# Altium PCB LKS_EVB_MVPOW_V4.0.PcbDoc (part 1 of 2)
Units mil, origin at the board's own origin, x right, y up, seen from the top; angles counter-clockwise.
Board outline 11300 x 7874.02 mil, 2 copper layers (Top Layer, Bottom Layer); 132 components, 86 nets, 363 pads, 334 vias.
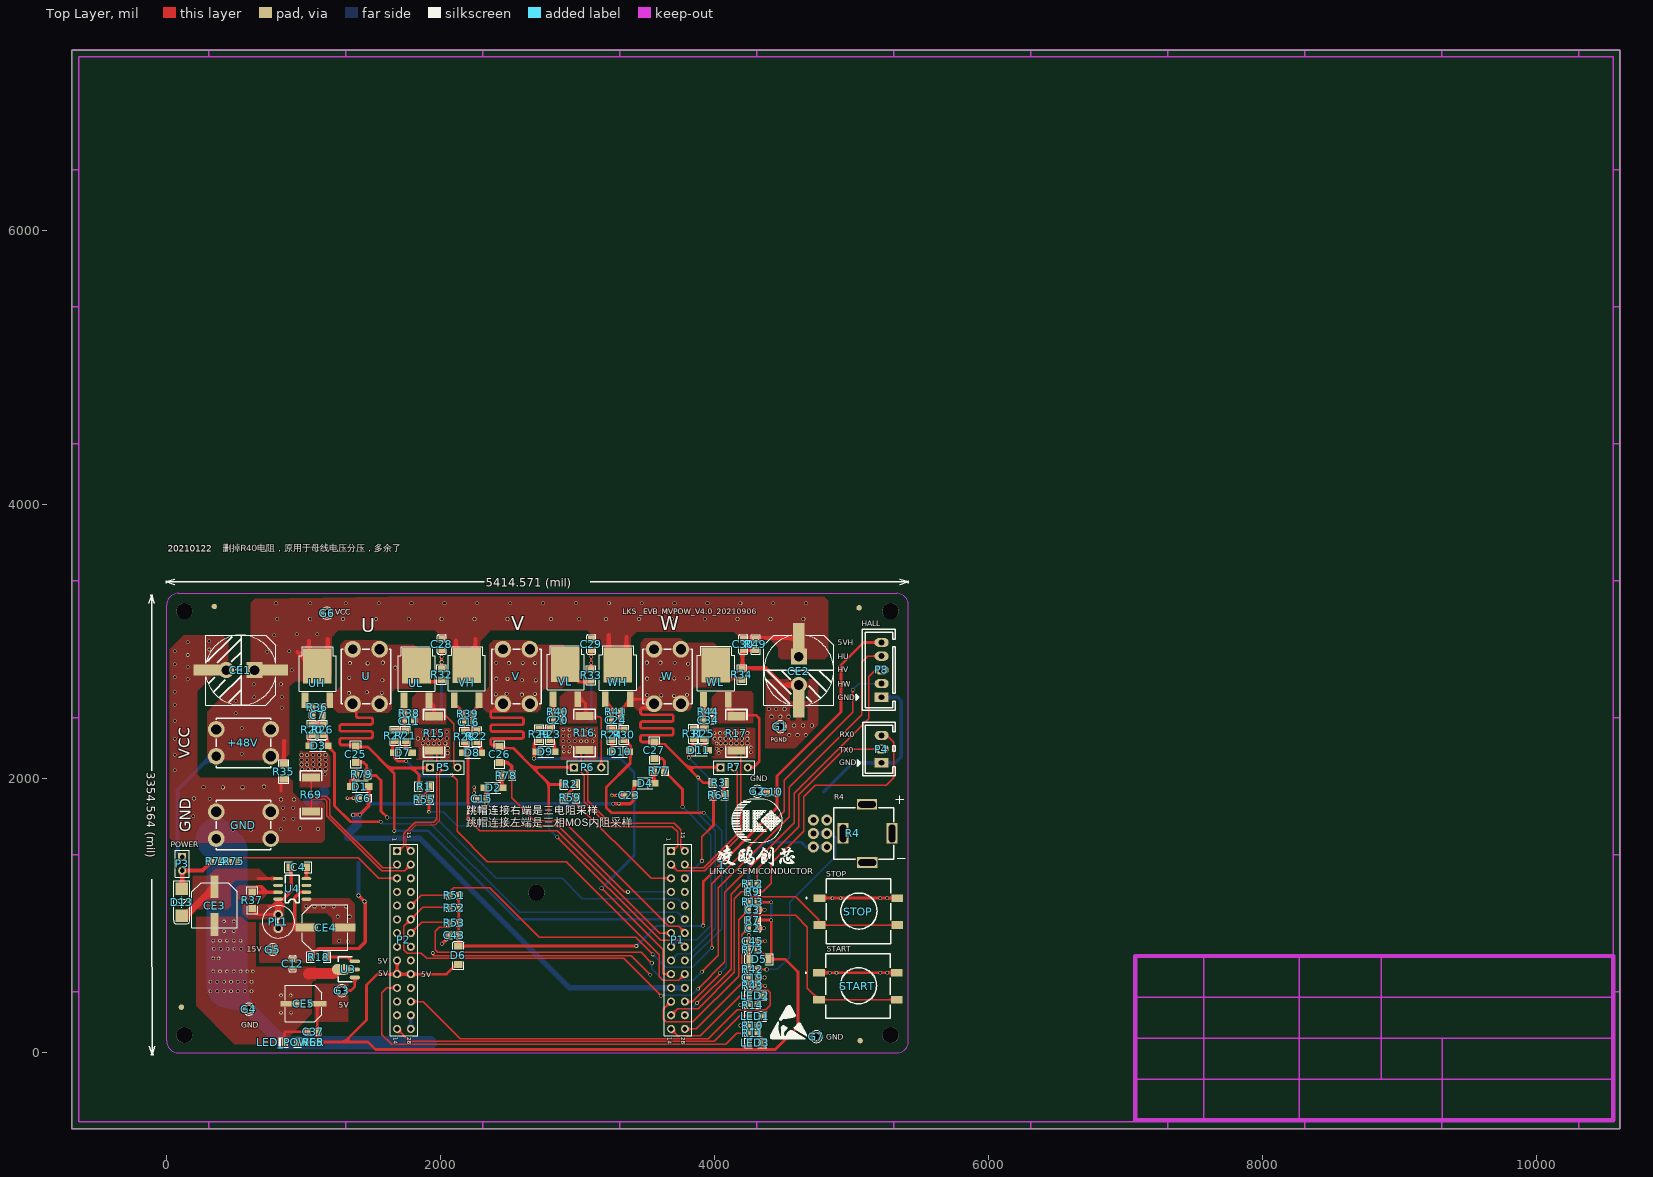
[diagram p0: Top Layer view]
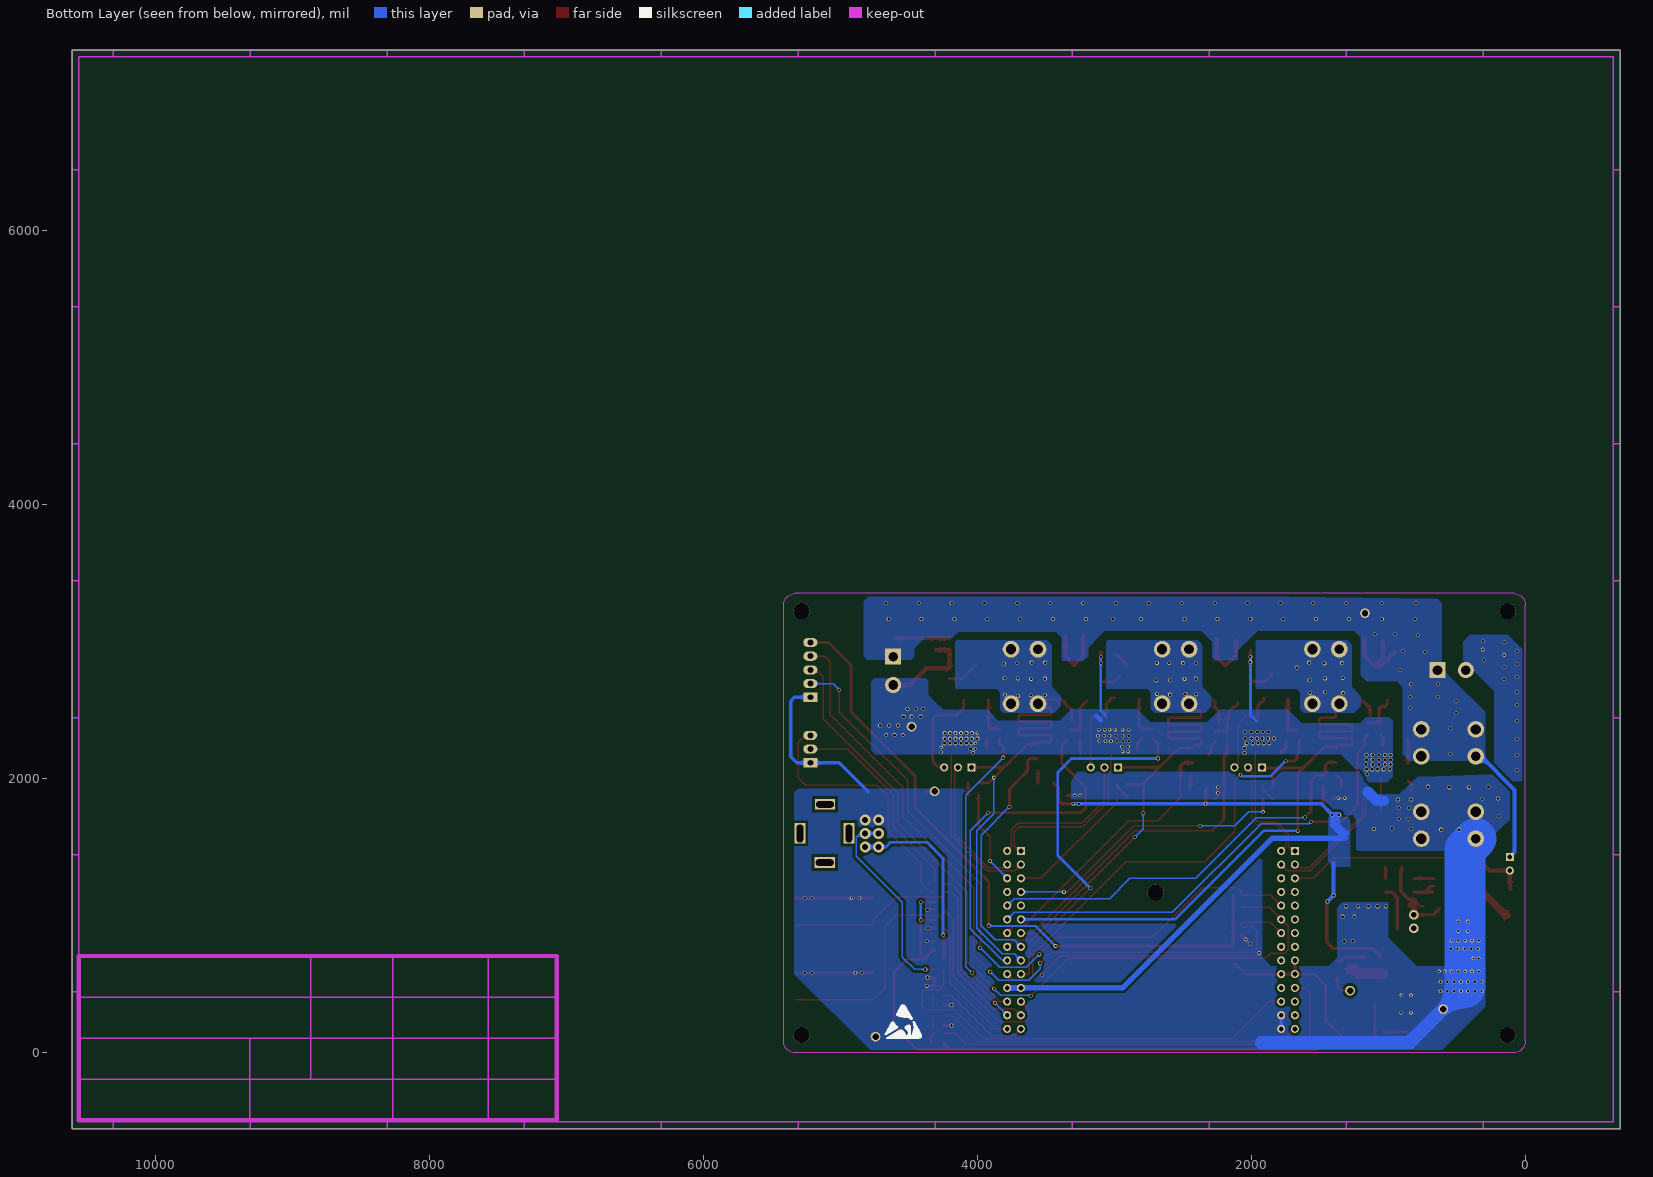
[diagram p1: Bottom Layer view, seen from below]
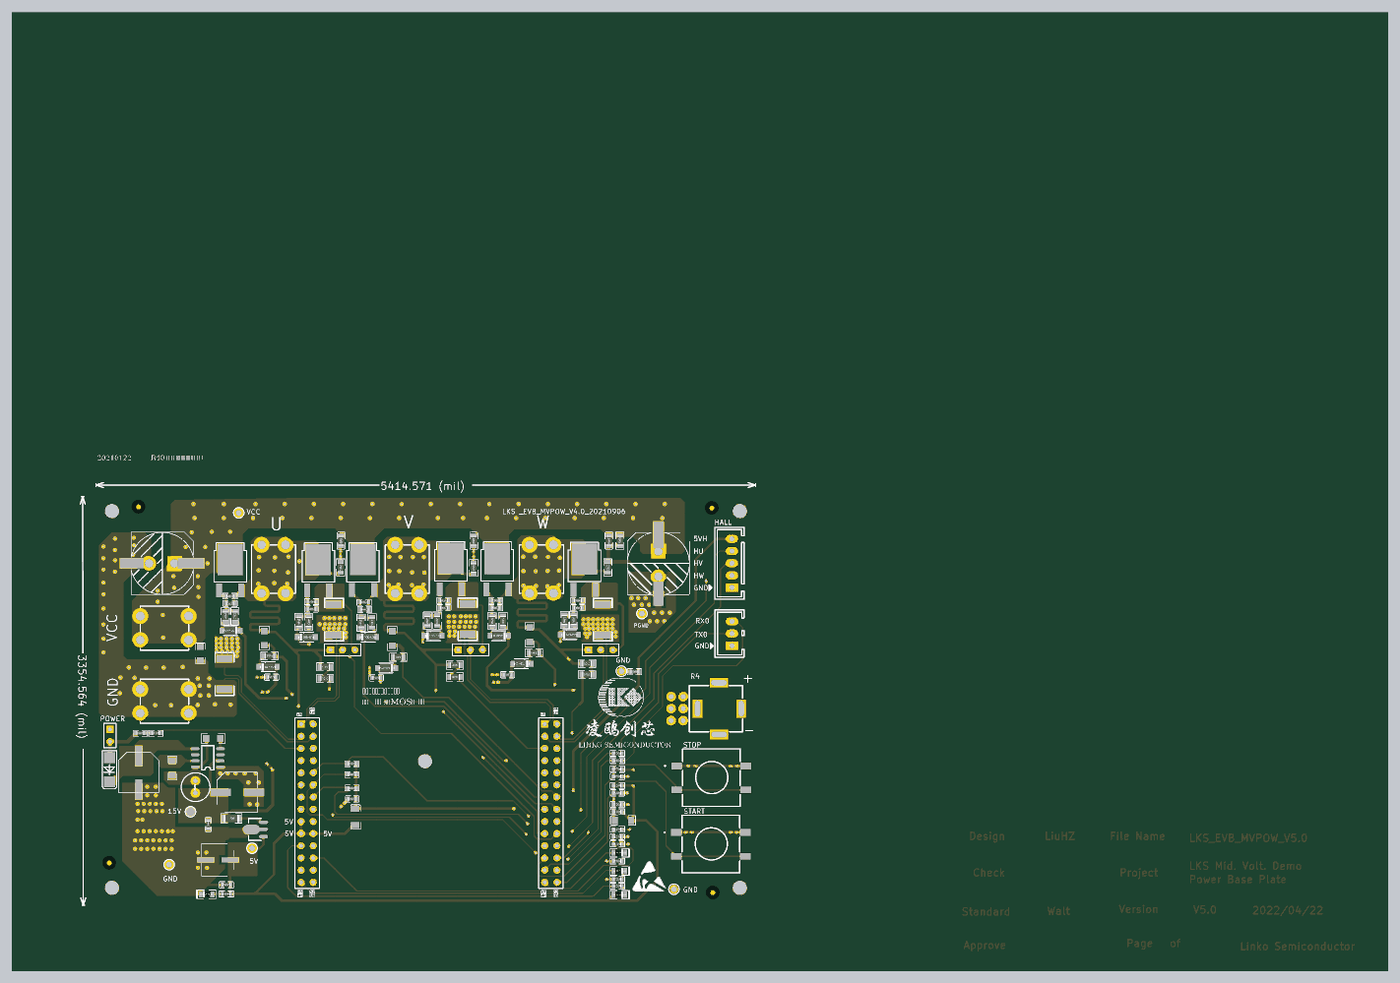
[diagram p3: 3D render of the assembled board from above, using the file's embedded part models]

## Layer stack, top to bottom
Top Solder: solder mask 0.4, Solder Resist, Dk 3.5
Top Layer: signal copper 1.4
Dielectric1: dielectric 12.6, FR-4, Dk 4.8
Bottom Layer: signal copper 1.4
Bottom Solder: solder mask 0.4, Solder Resist, Dk 3.5

## Board outline
-690.69,7320.3 -690.69,-553.71 10608.52,-553.71 10608.52,7319.52 10609.31,7320.3

## Design rules (kind name [scope] priority, off if disabled: settings)
Clearance [InPolygon] p1: gap=20 ignorepadtopadclearanceinfootprint=FALSE except(0: Arc-Hole Track-Hole SMDPad-Hole THPad-Hole Via-Hole Fill-Hole Poly-Hole Region-Hole Text-Hole)
Clearance Clearance_48V [InNet('+48V')] p2: gap=30 ignorepadtopadclearanceinfootprint=FALSE except(0: Arc-Hole Track-Hole SMDPad-Hole THPad-Hole Via-Hole Fill-Hole Poly-Hole Region-Hole Text-Hole)
Clearance Clearance_4 [InNet('PGND')] p3 off: gap=20 ignorepadtopadclearanceinfootprint=FALSE except(0: Arc-Hole Track-Hole SMDPad-Hole THPad-Hole Via-Hole Fill-Hole Poly-Hole Region-Hole Text-Hole)
Clearance Clearance_5V [InNet('+5V')] p4 off: gap=20 ignorepadtopadclearanceinfootprint=FALSE except(0: Arc-Hole Track-Hole SMDPad-Hole THPad-Hole Via-Hole Fill-Hole Poly-Hole Region-Hole Text-Hole)
Clearance Clearance_15V [InNet('+15V')] p5: gap=20 ignorepadtopadclearanceinfootprint=FALSE except(0: Arc-Hole Track-Hole SMDPad-Hole THPad-Hole Via-Hole Fill-Hole Poly-Hole Region-Hole Text-Hole)
Clearance Clearance_5 [All] p6: gap=10 ignorepadtopadclearanceinfootprint=FALSE except(0: Arc-Hole Track-Hole SMDPad-Hole THPad-Hole Via-Hole Fill-Hole Poly-Hole Region-Hole Text-Hole)
ComponentClearance [All] p1 off: gap=0 collisioncheckmode=3 verticalgap=0 showdistances=FALSE
FabricationTestpoint [(IsPad And (OnTopLayer Or OnBottomLayer))] p1: side=3 testpointundercomponent=TRUE minsize=40 maxsize=100 preferedsize=60 minholesize=0 maxholesize=40 preferedholesize=32 testpointgrid=1 allowsidetop=TRUE allowsidebottom=TRUE usegrid=TRUE gridtolerance=0.01
HoleSize [All] p1: absolutevalues=TRUE maxlimit=200 minlimit=1 maxpercent=80.000 minpercent=20.000
PlaneConnect [All] p1: planeconnectstyle=Direct reliefexpansion=20 reliefentries=4 reliefconductorwidth=10 reliefairgap=10
PolygonConnect [All] p1: connectstyle=Direct reliefconductorwidth=25 reliefentries=4 polygonreliefangle="90 Angle" airgapwidth=10
RoutingVias [All] p1: holewidth=13.78 width=19.68 viastyle="Through Hole" minholewidth=13.78 minwidth=19.68 maxholewidth=13.78 maxwidth=19.68
SilkToSolderMaskClearance SilkscreenOverComponentPads [IsPad] p1: minsilkscreentomaskgap=10 clearancetoexposedcopper=TRUE
SolderMaskExpansion [All] p1: expansion=4 istentingtop=FALSE
Width Width_2 [All] p1 off: maxlimit=10 minlimit=10 preferedwidth=10
Width Width_1 [InNet('5V-T')] p2 off: maxlimit=40 minlimit=40 preferedwidth=40
Width Width_VH [InNet('5V1')] p3 off: maxlimit=40 minlimit=40 preferedwidth=40
Width Width_5V [InNet('5V')] p4 off: maxlimit=40 minlimit=40 preferedwidth=40
Width Width_14.3V [InNet('+14.3V')] p5 off: maxlimit=50 minlimit=50 preferedwidth=50
Width Width_15V [InNet('+15V')] p6 off: maxlimit=40 minlimit=40 preferedwidth=40
Width Width_48V [InNet('+48V')] p7 off: maxlimit=40 minlimit=40 preferedwidth=40
Width [All] p8: maxlimit=500 minlimit=1 preferedwidth=40
25 further rules are at their usual default settings.

## Components (designator, comment, footprint, x,y, rotation, side; value= is the part's Value field where it differs from the comment)
1 "LKS_sign" LKS_LOGO2 4053.45,1370.89 r0 top
+48V "M4" M4_CONECTOR 362.32,2361.91 r180 top locked
C2 "100nF/50V" 0603C 4279.87,910 r180 top
C3 "100nF/50V" 0603C 4280,1045 r0 top
C4 "1uF/100V" 1206 1020,1355 r180 top value=10uF/100V
C6 "100nF/50V" 0603C 1440,1860 r0 top
C7 "1nF/50V" 0603C 1100,2465 r0 top
C10 "100nF/10V" 0603C 4420,1905 r180 top
C11 "1nF/50V" 0603C 1770,2420 r0 top
C12 "100nF/50V" 0603C 920,650 r270 top
C15 "100nF/50V" 0603C 2300,1855 r0 top
C16 "1nF/50V" 0603C 2205,2415 r0 top
C19 "100nF/50V" 0603C 4280,550 r180 top
C20 "1nF/50V" 0603C 2855,2430 r0 top
C23 "100nF/50V" 0603C 3378,1880 r0 top
C24 "1nF/50V" 0603C 3280,2430 r0 top
C25 "10uF/25V" 1206 1380.54,2121.64 r90 top value=47uF/50V
C26 "10uF/25V" 1206 2430,2120 r90 top value=47uF/50V
C27 "10uF/25V" 1206 3560,2150 r90 top value=47uF/50V
C28 "100nF/100V" 0805C 2010.14,2982.01 r90 top
C29 "100nF/100V" 0805C 3100.14,2982.01 r90 top
C30 "100nF/100V" 0805C 4210.14,2982.01 r90 top
C34 "1nF/50V" 0603C 3955,2430 r0 top
C37 "100nF/50V" 0603C 1070,155 r0 top
C43 "100nF/50V" 0603C 2100,860 r0 top value=104
C45 "100nF/50V" 0603C 4279.87,815 r180 top value=104
CE1 "220uF/63V" "220UF/63V 12.5*12.5" 643.54,2794.86 r270 top
CE2 "220uF/63V" "220UF/63V 12.5*12.5" 4615.51,2894.77 r0 top
CE3 "10UF/100V" "220UF/25V paster8*10" 350,1075 r0 top
CE4 "220uF/25V" "220UF/25V 8*10" 1160,915 r90 top
CE5 "220uF/16V" "220UF/16V 6.3*7.7" 1000,360 r270 top
D1 "1N4007/SOD-123" SOD123 1410,1945 r180 top
D2 "1N4007/SOD-123" SOD123 2385,1935 r0 top
D3 "1N4007/SOD-123" SOD123 1107.59,2243.13 r0 top
D4 "1N4007/SOD-123" SOD123 3495,1970 r0 top
D5 "1N4007" D1206 4260,685 r0 top
D6 "1N4007" D1206 2131.13,777.78 r270 top
D7 "1N4007/SOD-123" SOD123 1725.04,2190 r180 top
D8 "1N4007/SOD-123" SOD123 2230,2190 r180 top
D9 "1N4007/SOD-123" SOD123 2765,2200 r180 top
D10 "1N4007/SOD-123" SOD123 3310,2200 r0 top
D11 "1N4007/SOD-123" SOD123 3885.04,2210 r180 top
D13 "ES1J" DO-214AC 110,1100 r270 top
G1 "PAD1.2" PAD1.2#1 4480.77,2382.24 r0 top
G2 "PAD1.2" PAD1.2#1 4312.32,1909.64 r0 top
G3 "PAD1.2" PAD1.2#1 1280,455 r0 top
G4 "PAD1.2" PAD1.2#1 600,320 r0 top
G5 "PAD1.2" PAD1.2#2 775,755 r0 top
G6 "PAD1.2" PAD1.2#1 1170.96,3209.96 r0 top
G7 "PAD1.2" PAD1.2#1 4743.57,118.6 r0 top
GND "M4" M4_CONECTOR 362.32,1761.11 r180 top locked
LED1 "LED" SOD323 4292.9,270 r0 top
LED2 "LED" SOD323 4292.9,420 r0 top
LED3 "LED" SOD323 4292.9,75 r0 top
LED_POWER "LED_R" SOD323 910,75 r180 top
P1 "Header 14X2A" HDR2X14_CEN 3682.62,1475.19 r270 top locked
P2 "Header 14X2A" HDR2X14_CEN 1682.62,1475.19 r270 top locked
P3 "Header 2" HDR1X2 113.86,1430.98 r270 top locked
P4 "P13" 2.54-XH-3A-180 5219.88,2118.44 r270 top
P5 "Header 3" HDR1X3 1924.05,2084.61 r0 top
P6 "Header 3" HDR1X3 2972.79,2084.61 r0 top locked
P7 "Header 3" HDR1X3 4042.39,2084.61 r0 top locked
P8 "Header 5" 2.54-XH-5A-180 5219.52,2796.37 r270 top
PL1 "1mH  6*8" L_DIP_6*8MM 814.94,909.79 r90 top locked
R1 "20K 1%" 0805R 1880,1945 r180 top
R2 "20K 1%" 0805R 2945,1960 r180 top
R3 "20K 1%" 0805R 4030.14,1972.01 r180 top
R4 "RPot" RK097-W-1 5014.05,1602.13 r270 top locked value=20K
R7 "10K" 0603R 4279.85,970 r180 top
R9 "10R" 0603R 4279.85,1175 r0 top
R10 "5.1K" 0603R 4279.85,200 r180 top value=10K
R11 "5.1K" 0603R 4279.85,145 r180 top value=10K
R12 "10R" 0603R 4279.85,1235 r180 top value=100R
R13 "10K" 0603R 4279.85,1105 r0 top
R14 "5.1K" 0603R 4279.85,350 r180 top value=10K
R15 "0.005R/2512" 2512 1952.89,2455.91 r270 top
R16 "0.005R/2512" 2512 3049.9,2212.58 r90 top
R17 "0.005R/2512" 2512 4159.55,2455.91 r270 top
R18 "10R" 1206R 1110,700 r0 top value=K
R20 "10R" 0805R 1060,2360 r270 top value=K
R21 "10R" 0805R 1745,2315 r270 top value=K
R22 "10R" 0805R 2265,2310 r270 top value=K
R23 "10R" 0805R 2800,2325 r270 top value=K
R24 "10R" 0805R 3250.14,2322 r270 top value=K
R25 "10R" 0805R 3920,2330 r270 top value=K
R26 "51R" 0805R 1140,2360 r90 top value=K
R27 "51R" 0805R 1665,2315 r90 top value=K
R28 "51R" 0805R 2175,2308 r90 top value=K
R29 "51R" 0805R 2720,2325 r90 top value=K
R30 "51R" 0805R 3340,2322 r90 top value=K
R31 "51R" 0805R 3845,2330 r90 top value=K
R32 "51K" 0805R 2007.13,2762.01 r270 top value=K
R33 "51K" 0805R 3098.95,2757.01 r270 top value=K
R34 "51K" 0805R 4200.14,2762.01 r270 top value=K
R35 "47K" 1206R 855.77,2054.36 r270 top value=K
R36 "20K1%" 0603R 1100,2525 r180 top value=K
R37 "0.3R" 1206 625,1055 r90 top value=1R
R38 "20K1%" 0603R 1770,2480 r180 top value=K
R39 "20K1%" 0603R 2200,2475 r180 top value=K
R40 "20K1%" 0603R 2855,2490 r180 top value=K
R41 "20K1%" 0603R 3280,2490 r180 top value=K
R42 "10K" 0603R 4280,610 r180 top value=K
R43 "20K" 0603R 4280,490 r180 top value=K
R44 "20K1%" 0603R 3955,2490 r180 top value=K
R49 "51K" 0805R 4300.14,2982.01 r270 top value=K
R51 "2K" 0603R 2100,1150 r0 top
R52 "2K" 0603R 2100,1060 r0 top
R53 "2K" 0603R 2100,950 r0 top
R55 "20K 1%" 0805R 1880,1850 r180 top
R59 "20K 1%" 0805R 2945.14,1862.01 r180 top
R61 "20K 1%" 0805R 4030.14,1882.01 r0 top
R65 "5.1K" 0603R 1070,80 r180 top value=510R
R69 "0.005R/2512" 2512 1054.8,2009.54 r270 top
R73 "10K" 0603R 4279.85,755 r180 top
R74 "20K1%" 0603R 362,1400 r0 top
R75 "20K1%" 0603R 490,1400 r0 top
R77 "4.7R" 0805R 3595,2060 r180 top
R78 "4.7R" 0805R 2480,2025 r180 top
R79 "4.7R" 0805R 1423,2035 r180 top
START "SW-PB" "SW-PB  12*12" 5046.18,487.56 r0 top locked
STOP "SW-PB" "SW-PB  12*12" 5049.86,1032.41 r0 top locked
U "M4" M4_CONECTOR 1554.74,2947.17 r90 top
U3 "LM7805" SOT-89 1325,610 r90 top
U4 "LKS620" so-8 1020,1125 r180 top
UH "NCE8295AK" TO-252 1100.6,2699.83 r0 top
UL "NCE8295AK" TO-252 1824.23,2700.27 r0 top
V "M4" M4_CONECTOR 2651.89,2947.17 r90 top
VH "NCE8295AK" TO-252 2190.2,2701.83 r0 top
VL "NCE8295AK" TO-252 2911.27,2709.11 r0 top
W "M4" M4_CONECTOR 3754.7,2947.17 r90 top
WH "NCE8295AK" TO-252 3293.47,2707.27 r0 top
WL "NCE8295AK" TO-252 4009.18,2704.65 r0 top

## Footprints (in the part's own frame and the unit in brackets; to place one, negate y for a bottom-side part, rotate by r counter-clockwise, add the part's x,y. Pads: shape width x height; smd on the part's side, far side on the other; paste and mask are expansions set on the pad)
2.54-XH-3A-180 [mm]
  rect 1.7x2.6 hole 1.1: 1(0,0)
  oval 1.7x2.6 hole 1.1: 2(-2.54,0) 3(-5.08,0)
  silkscreen extent -7.49,-4.5 2.41,2.54
2.54-XH-5A-180 [mm]
  rect 1.7x2.6 hole 1.1: 1(5.08,0)
  oval 1.7x2.6 hole 1.1: 2(2.54,0) 3(0,0) 4(-2.54,0) 5(-5.08,0)
  silkscreen extent -7.49,-4.78 7.49,2.54
"220UF/16V 6.3*7.7" [mm]
  rect 1x3.5 smd: 1(0,2.54) 2(0,-2.54)
  silkscreen extent -3.4,-3.4 3.4,3.4
"220UF/25V 8*10" [mm]
  rect 1.5x4.2 smd: 1(0,3.492) 2(0,-3.492)
  silkscreen extent -4.2,-4.13 4.2,4.27
"220UF/25V paster8*10" [mm]
  rect 1.5x4.2 smd: 1(0,3.492) 2(0,-3.492)
  silkscreen extent -4.2,-4.13 4.2,4.27
"220UF/63V 12.5*12.5" [mm]
  rect 2.1x5.5 smd: 1(0,3.429)
  rect 3x3 hole 1.778: 1(0,-0.04)
  round 3 hole 1.778: 2(0,-5.3)
  rect 2.1x5 smd: 2(0,-8.867)
  silkscreen extent -6.5,-9.07 6.5,3.93
0603C [mm]
  rect 0.9x0.95 smd: 1(-0.813,0) 2(0.813,0)
  silkscreen extent -1.5,-0.66 1.5,0.66, body extent -0.8,-0.4 0.8,0.4, height 0.45
0603R [mil]
  rect 38x32 smd: 1(-32,0) 2(32,0)
  silkscreen extent -59,-24 59,24, body extent -31,-16 32,16, height 18
0805C [mil]
  rect 46x51.18 smd: 1(-38,0) 2(38,0)
  silkscreen extent -70,-33 70,33, body extent -40,-25 38,25, height 22
0805R [mil]
  rect 46x51.18 smd: 1(-38,0) 2(38,0)
  silkscreen extent -70,-34 70,34, body extent -39,-25 39,25, height 22
1206 [mm]
  rect 1.35x1.45 smd: 1(-0.01,-0.01) 2(2.99,-0.01)
  silkscreen extent -1.02,-1 4,0.98
1206R [mil]
  rect 50x60 smd: 1(-55,0) 2(55,0)
  silkscreen extent -88,-39 88,39, body extent -62,-31 64,32, height 24
2512 [mm]
  rect 1.5x3.3 smd: 1(-0.04,-0.01) 2(6.31,-0.01)
  silkscreen extent -1.31,-1.98 7.56,1.96
D1206 [mm]
  rect 1.3x1.6 smd: 1(3.346,-0.04) 2(-0.054,-0.04)
  silkscreen extent -0.97,-1.06 4.26,0.98
DO-214AC [mm]
  rect 2.3x2.3 smd: 1(-2.502,0) 2(2.502,0)
  silkscreen extent -4,-1.51 4,1.52
HDR1X2 [mm] "Connector; Header; 2 Position"
  rect 1.5x1.5 hole 0.9: 1(0,0)
  round 1.5 hole 0.9: 2(2.54,0)
  silkscreen extent -1.27,-1.27 3.81,1.27
HDR1X3 [mm]
  rect 1.5x1.5 hole 0.9: 1(0,0)
  round 1.5 hole 0.9: 2(2.54,0) 3(5.08,0)
  silkscreen extent -1.27,-1.27 6.35,1.27
HDR2X14_CEN [mm] "Connector; Header; 14x2 Position"
  rect 1.5x1.5 hole 0.9: 1(0,0)
  round 1.5 hole 0.9: 2(2.54,0) 3(5.08,0) 4(7.62,0) 5(10.16,0) 6(12.7,0) 7(15.24,0) 8(17.78,0) 9(20.32,0) 10(22.86,0) 11(25.4,0) 12(27.94,0) 13(30.48,0) 14(33.02,0) 15(0,2.54) 16(2.54,2.54) 17(5.08,2.54) 18(7.62,2.54) 19(10.16,2.54) 20(12.7,2.54) 21(15.24,2.54) 22(17.78,2.54) 23(20.32,2.54) 24(22.86,2.54) 25(25.4,2.54) 26(27.94,2.54) 27(30.48,2.54) 28(33.02,2.54)
  silkscreen extent -1.27,-1.27 34.29,3.81
L_DIP_6*8MM [mm]
  round 1.8 hole 1: 1(0,0) 2(2.5,0)
  silkscreen extent -1.8,-3.04 4.2,2.95
LKS_LOGO2 [mil] "标?"
  silkscreen extent 70,167 440,482
M4_CONECTOR [mm]
  round 3.1 hole 1.9: 1(-10.1,0) 1(-10.1,5) 1(0,0)
  round 3.1 hole 1.8: 1(0,5)
  silkscreen extent -10.1,-2.1 0,7.1
PAD1.2#1 [mm]
  round 1.8 hole 1.2: 1(0,0)
  silkscreen extent -1.1,-1.1 1.1,1.1
PAD1.2#2 [mm]
  round 1.8 smd: 1(0,0)
  silkscreen extent -1.1,-1.1 1.1,1.1
RK097-W-1 [mm] "电?"
  rect 2x3.8 hole 1.2 slot 3.3 at 90 deg: 0(-5.4,2.503) 0(5.4,2.554)
  rect 3.8x2 hole 1.2 slot 3.3 at 0 deg: 0(0,7.15) 0(0,-1.93)
  round 2.032 hole 1.1: 1(2.5,-7.45) 2(-2.5,-7.45) 3(0,-7.45) 4(-2.5,-4.95) 5(0,-4.95) 6(2.5,-4.95)
  silkscreen extent -4.8,-3.65 4.8,7.45
so-8 [mm]
  oval 1.8x0.61 smd: 1(-0.02,0.05) 2(-0.02,-1.22) 3(-0.02,-2.49) 4(-0.02,-3.76) 5(5.238,-3.76) 6(5.238,-2.49) 7(5.238,-1.22) 8(5.238,0.05)
  silkscreen extent 1.35,-4.4 3.89,0.68
SOD123 [mm] "SOD-123; 2 Leads; Body 2.7 x 1.6 mm, (LxW)"
  rect 1.5x1.22 smd: 1(-1.65,0) 2(1.65,0)
  silkscreen extent -1.55,-1.03 1.38,1.02, body extent -1.93,-0.82 1.93,0.87, height 0.92
SOD323 [mil]
  rect 43.31x50 smd: 1(-40,-2) 2(45.63,-2)
  silkscreen extent -72,-37 87,33, body extent -48,-28 54,24, height 39
SOT-89 [mm]
  oval 0.7x1.9 smd: 1(-1.5,-1.25) 3(1.5,-1.25)
  oval 2x3.5 smd: 2(0,1.25)
  oval 0.7x2.1 smd: 2(0,-1.15)
  silkscreen extent -2.3,-0.75 2.3,1.85
"SW-PB  12*12" [mm] "按?"
  rect 2.2x1.397 smd: 1(-7.2,2.5) 2(-7.2,-2.5) 3(7.2,2.5) 4(7.2,-2.5)
  silkscreen extent -9.75,-5.94 6.02,6.06
TO-252 [mm]
  rect 1.25x2.85 smd: 1(-2.3,-3.2) 3(2.3,-3.2)
  rect 5.3x6.5 smd: 2(0,3.2)
  silkscreen extent -3.4,-1.5 3.4,6.71

## Part data
+48V GND U V W: library part Socket, "Socket", LatestRevisionDate=17-Jul-2002, LatestRevisionNote="Re-released for DXP Platform.", Publisher="Altium Limited"
C2 C3 C7 C10 C11 C12 C16 C20 C24 C28 C29 C30 C34: library part CAP, "Capacitor"
C4 C43 C45: library part Cap, "Capacitor", LatestRevisionDate=17-Jul-2002, LatestRevisionNote="Re-released for DXP Platform.", PackageDescription="Radial Cap, Thru-Hole; 2 Leads; 0.3 in Pin Spacing", PackageReference=RAD-0.3, Published=8-Jun-2000, Publisher="Altium Limited"
C6 C15 C19 C23 C37: library part C, "Capacitor"
C25 C26 C27: library part "Cap Pol1", "Polarized Capacitor (Radial)", = Value=47uF/50V, LatestRevisionDate=17-Jul-2002, LatestRevisionNote="Re-released for DXP Platform.", PackageReference=RB7.6-15, Published=8-Jun-2000, Publisher="Altium Limited"
CE1 CE2 CE4 CE5: library part "Capacitor Pol", "Capacitor---电解电容"
CE3: library part CD, "Electrolytic Capacitor"
D1 D2 D3 D4 D7 D8 D9 D10 D11 D13: library part Diode, "Default Diode", PackageDocument=Sep-1996, Code_JEDEC=DO-214-AB, LatestRevisionDate=17-Jul-2002, LatestRevisionNote="Re-released for DXP Platform.", PackageReference=SMC, Published=8-Jun-2000, Publisher="Altium Limited"
D5 D6: library part "Diode 1N4007", "1 Amp General Purpose Rectifier", Code_JEDEC=DO-204-AL, ComponentLink1Description="Manufacturer Link", ComponentLink1URL=http://www.fairchildsemi.com/, ComponentLink2Description=Datasheet, ComponentLink2URL=http://www.fairchildsemi.com/ds/1N%2F1N4001.pdf, DatasheetVersion=1998, LatestRevisionDate=17-Jul-2002, LatestRevisionNote="Re-released for DXP Platform.", PackageDescription="Diode, Axial; Body 5.2 x 2.7 mm (LxDia. max), Lead Dia. 0.86 mm (max)", PackageReference=DO-41, PackageVersion=Aug-1999, Published=8-Jun-2000, Publisher="Altium Limited"
G1 G2 G3 G4 G5 G6 G7: library part CON1, "Connector"
LED_POWER: library part LED
P1 P2: "Header, 14-Pin, Dual row", LatestRevisionDate=17-Jul-2002, LatestRevisionNote="Re-released for DXP Platform.", Publisher="Altium Limited"
P3: "Header, 2-Pin", LatestRevisionDate=17-Jul-2002, LatestRevisionNote="Re-released for DXP Platform.", Publisher="Altium Limited"
P4: library part "Header 3", "Header, 3-Pin", LatestRevisionDate=17-Jul-2002, LatestRevisionNote="Re-released for DXP Platform.", Publisher="Altium Limited"
P5 P6 P7: "Header, 3-Pin", LatestRevisionDate=17-Jul-2002, LatestRevisionNote="Re-released for DXP Platform.", Publisher="Altium Limited"
P8: "Header, 5-Pin", LatestRevisionDate=17-Jul-2002, LatestRevisionNote="Re-released for DXP Platform.", Publisher="Altium Limited"
PL1: library part L
R1 R2 R3 R51 R52 R53 R55 R59 R61: library part RES/1
R4: "Potentiometer", LatestRevisionDate=17-Jul-2002, LatestRevisionNote="Re-released for DXP Platform.", PackageDescription="Variable Resistor, Thru-Hole; 3 Leads", PackageReference=VR5, Published=8-Jun-2000, Publisher="Altium Limited", Set Position=0.5, Sim Note="Enter the Resistance value and the set point into parameter fields."
R7 R9 R10 R11 R12 R13 R14 R37 R65 R73: library part Res2, "Resistor", LatestRevisionDate=17-Jul-2002, LatestRevisionNote="Re-released for DXP Platform.", Published=8-Jun-2000, Publisher="Altium Limited"
  R7 R10 R11 R13 R14: PackageReference=AXIAL-0.4
  R9 R12: PackageReference=0603R
  R37 R73: PackageDescription="Axial Device, Thru-Hole; 2 Leads; 0.4 in Pin Spacing", PackageReference=AXIAL-0.4
  R65: PackageDescription="Axial Device, Thru-Hole; 2 Leads; 0.4 in Pin Spacing", PackageReference=0603R
R15 R16 R17 R69 R77 R78 R79: library part RES2短
R18 R26 R35 R36 R38 R39 R40 R41 R42 R43 R44: library part Res, "Resistor", LatestRevisionDate=17-Jul-2002, LatestRevisionNote="Re-released for DXP Platform.", PackageDescription="Axial Device, Thru-Hole; 2 Leads; 0.4 in Pin Spacing", PackageReference=AXIAL-0.4, Published=8-Jun-2000, Publisher="Altium Limited"
R20 R21 R22 R23 R24 R25 R27 R28 R29 R30 R31 R32 R33 R34 R49: library part 1Res, "Resistor", LatestRevisionDate=17-Jul-2002, LatestRevisionNote="Re-released for DXP Platform.", PackageDescription="Axial Device, Thru-Hole; 2 Leads; 0.4 in Pin Spacing", PackageReference=AXIAL-0.4, Published=8-Jun-2000, Publisher="Altium Limited"
R74 R75: library part R
START STOP: "Switch", LatestRevisionDate=17-Jul-2002, LatestRevisionNote="Re-released for DXP Platform.", PackageDescription="Switch; 2 Leads", PackageReference=SPST-2, Published=24-Mar-1999, Publisher="Altium Limited"
U3: library part VOL-78
UH UL VH VL WH WL: library part MOS

## Free pads (board coordinates)
  round 39.37 / inner round 0 / far side round 0 all layers, no hole: 1(108.28,334) 1(348.28,3259) 3(5054.85,3248.97) 4(5062.77,89.9)
  round 118.11 hole 118.11: 3(130,130) 3(130,3224.57) 3(2700,1170) 3(5284.57,130) 3(5284.57,3224.57)

## Via types
v1: diameter 26, hole 16, Top Layer to Bottom Layer, 92 vias
v2: diameter 28, hole 20, Top Layer to Bottom Layer, 77 vias
v3: diameter 27.99, hole 20, Top Layer to Bottom Layer, 73 vias
v4: diameter 28, hole 18, Top Layer to Bottom Layer, 52 vias
v5: diameter 26, hole 18, Top Layer to Bottom Layer, 40 vias

## Nets (pads, with @x,y where several pads share a name; then routed paths per layer and width w, separated by ;. In a path a pad name is that pad's centre, name@x,y a point inside that pad or via, vN(x,y) a via of type N, cw(c..) or ccw(c..) an arc to the next point about the centre after c; other vN are vias at no path point)
5V-T: C45.2 D5.2 R4.1 R4.6 R73.2 | length 1373.5
  Top Layer w20: v2(4250,860) 4247.87,857.87 C45.2@4247.87,815 4247.87,693.43 D5.2@4257.87,683.43
  Bottom Layer w20: v2(4250,860) 4251.3,861.3 4251.3,1420.74 4368.48,1537.92 4634.11,1537.92 4668.32,1503.71 R4.1@4720.74,1503.71 R4.6@4819.17,1503.71
5VH: C10.1 C43.2 D6.2 P8.5 R51.2 R52.2 R53.2 | length 4889.9
  Top Layer w20: D6.2@2129.56,779.91 v4@3429.81,779.91 ; R52.2@2132.68,1062.49 R52.2@2132.89,1062.49 ; D6.2@2132.89,783.24 R51.2@2132.89,1150.16 ; v4@3917.88,929.06 3917.88,1252.88 4455,1790 4455,2021.57 4922.83,2489.4 4922.83,2830.95 5088.26,2996.37 P8.5@5209.99,2996.37
  Bottom Layer w15: 3576.03,927.09 v4@3914.55,927.09
  Bottom Layer w20: v4(3429.81,780.87) 3576.03,927.09 ; v4@3914.55,927.09 v4(3916.91,929.45)
+5V: C37.2 CE5.1 D5.1 D6.1 G3.1 LED3.1 P2.9 P2.10 P2.24 R7.1 R13.2 R65.1 R73.1 U3.1 | length 6796.4
  Top Layer w20: CE5.1@1100,360 1100,82 R65.1@1102,80 1300,80 ; G3.1@1280,455 1280.43,455.43 1345.43,455.43 1374.21,484.21 U3.1@1374.21,550.94 ; P2.9@1682.39,675.19 P2.10@1682.39,575.19 ; D6.1@2129.56,646.05 2114.07,646.05 2043.22,575.19 P2.10@1682.39,575.19 ; LED3.1@4249.36,75.01 4200,25.65 4200,25 ; R13.2@4308.53,1100 v5(4413.14,1100) ; R73.1@4311.85,755 4320.16,755 D5.1@4391.73,683.43 ; R7.1@4311.85,970 v5(4413.13,970) 4413.13,718.13 D5.1@4400,705 ; D5.1@4402.26,683.43 4516.57,683.43 4608.12,591.88 4608.12,190.41 4442.71,25 4200,25 ; 1300,80 1460,240 1460,495.19 1540,575.19 P2.10@1682.39,575.19 ; 1300,80 1470,80 1525,25 4200,25
  Bottom Layer w20: v5(4413.13,970) v5(4413.14,1100)
+15V: C6.2 C12.1 C15.2 C23.2 CE4.1 D1.1 D2.1 D4.1 G5.1 P1.11 P1.25 PL1.1 R18.1 U4.2 | length 7397.2
  Top Layer w25: 935,905 935,1134.9 973.14,1173.03 U4.2@1020.79,1173.03 ; R18.1@1055,700 1055,705 1112.5,762.5 1402.5,762.5 1450,810 1450,1100 v2(1445,1105) v2(1400,1150) ; v2(1361.66,1737.79) v2@1409.34,1737.79 ; v2(1409.95,1738.4) 1474.96,1803.41 D1.1@1474.96,1945 ; D2.1@2320.04,1935 2323.29,1935 2334.81,1923.48 2334.81,1819.23 v1(2335,1819.04) ; v1(3260,1819.04) 3384.04,1819.04 3409.5,1844.5 3409.5,1938 D4.1@3441.5,1970
  Bottom Layer w25: v2@1408.12,1737.63 1408.89,1738.4 1489.52,1819.04 2238.63,1819.04 ; 2239.16,1819.04 v1(2335,1819.04) v1(3260,1819.04) v1@3300,1819.04
  Bottom Layer w30: 1400,1385 v2(1400,1150) v2(1445,1105)
  Bottom Layer w40: 1309.19,1602.08 1372.55,1665.44 v2@1372.55,1738.4 ; 1315.55,1571.62 1408.12,1664.18 v2@1408.12,1737.63 ; 1320.07,1567.11 1849.57,1567.11 2941.61,475.07 P1.25@3786.92,475.07 ; v2@1362.27,1738.4 v2@1372.55,1738.4 ; v2(1409.95,1738.4) 1408.89,1738.4 v2@1372.55,1738.4
  other v1: 3300,1820
+48V: +48V.1 C28.2 C29.2 C30.2 CE1.1 CE2.1 G6.1 P3.1 R35.1 R49.1 UH.2 VH.2 WH.2 | length 2949.3
  Top Layer w30: R35.1@855.77,2121.86 855.77,2273.43 859.02,2276.68 ; 956.99,2928.09 1059.26,2825.82 UH.2@1100.6,2825.82 ; 1038.45,3007.68 1038.45,2887.97 UH.2@1100.6,2825.82 ; 1176.04,3021.25 1176.04,2901.25 UH.2@1100.6,2825.82 ; 2112.24,3008.67 2112.24,2905.78 VH.2@2190.2,2827.82 2253.62,2891.23 2253.62,3020.28 ; 3227.7,3050.22 3227.7,2899.02 WH.2@3293.47,2833.25 3356.96,2896.74 3356.96,3036.05 ; C30.2@4203.69,3028.04 CE2.1@4602.7,3028.04
  Bottom Layer w30: P3.1@113.86,1430.98 78.4,1466.45 78.4,1919.7 328.7,2170 +48V.1@340,2170
  other v2: 807.92,3167.51 1047.92,3167.51 1287.92,3167.51 1527.92,3167.51 1767.92,3167.51 2007.92,3167.51 2247.92,3167.51 2487.92,3167.51 2806.1,3167.51 3012.62,3167.51 3207.92,3167.51 3447.92,3167.51 3687.92,3167.51 3927.92,3167.51 4167.92,3167.51 4407.92,3167.51 4647.92,3167.51 798.96,3282.46 1048.37,3282.46 1308.19,3282.46 1548.19,3282.46 1788.19,3282.46 2028.19,3282.46 2268.19,3282.46 2508.19,3282.46 2748.19,3282.46 2988.19,3282.46 3228.19,3282.46 3468.19,3282.46 3708.19,3282.46 3948.19,3282.46 4188.19,3282.46 4428.19,3282.46 4668.19,3282.46
  other v5: 550,2185 547.22,2370 505,2480 840,2520 505,2570 640,2595 840,2600 635,2690 835,2690 915,2795 735,2930 895.26,2930.67 785,3050 950,3055 1100,3055
DM_IN: D13.1 P3.2 R74.1 | length 378.8
  Top Layer w30: D13.1@110,1198.5 113.86,1202.36 P3.2@113.86,1330.98 260.98,1330.98 R74.1@330,1400
GND: C2.1 C3.2 C6.1 C10.2 C12.2 C15.1 C19.1 C23.1 C37.1 C43.1 C45.1 CE1.2 CE3.2 CE4.2 CE5.2 G2.1 G4.1 G7.1 GND.1 LED_POWER.2 P2.16 P2.27 P2.28 P4.1 P8.1 R4.2 R4.4 R10.2 R14.2 R35.2 R43.1 R69.2 START.1 START.3 STOP.1 STOP.3 U3.2 U4.1 | length 9636
  Top Layer w10: R69.2@1054.41,1761.11 1054.41,1842.43 1062.49,1850.51 1157.77,1850.51 1170,1838.27 1170,1730 1570,1330 1737.2,1330 P2.16@1782.39,1375.19 ; v5(1942.51,729.66) 1942.51,718.49 1951,710 3391.82,710 v5@3531.72,570.1
  Top Layer w20: 836.01,1911.43 836.01,1967.1 R35.2@855.77,1986.86 ; LED_POWER.2@864.37,77 860,81.37 860,145 870,155 C37.1@1038,155 ; v1(1320,1860) C6.1@1408,1860 ; v1(2245,1940) v1(2245,1900) 2245,1878 C15.1@2268,1855 ; v1(3250,1880) C23.1@3346.51,1880 ; v3(4190,200) R10.2@4247.85,200 ; v3(4190,350) R14.2@4247.85,350 ; C45.1@4311.87,815 v3(4370,815) ; C2.1@4311.87,910 v3(4360,910) ; C3.2@4312,1045 v3(4365,1045) ; G2.1@4312.09,1909.64 4313.05,1908.68 C10.2@4380,1908.68 ; v3(4365,550) C19.1@4312,550 R43.1@4312,490 v3(4370,490) ; START.1@4762.71,585.99 START.3@5329.64,585.99 ; STOP.1@4766.4,1130.83 STOP.3@5333.33,1130.83
  Top Layer w25: v5@2008.38,795.29 C43.1@2073.83,860.75
  Top Layer w80: 1035,575 1040,580 1217.52,580 1247.52,610 U3.2@1275.79,610
  Bottom Layer w20: P2.28@1782.39,175.19 P2.27@1782.39,275.19
  Bottom Layer w25: 4796.57,1905.9 5008.51,2117.85 5319.51,2117.85 ; P8.1@5209.99,2596.37 5335.99,2596.37 5364.15,2568.21 5364.15,2162.55 5319.51,2117.91
  Bottom Layer w80: 1036.4,1841.11 1083,1841.11 1148.08,1906.19
  Bottom Layer w100: 440,480 G4.1@600,320 845,75 1925,75
  Bottom Layer w300: GND.1@362.32,1564.26 440,1486.58 440,480
  other v1: 835,295 910,295 835,420 905,420 320,450 370,450 420,450 470,450 520,450 570,450 620,450 320,520 370,520 420,520 470,520 520,520 570,520 620,520 4840,585.99 4890,585.99 5210,585.99 5260,585.99 340,595 390,595 440,595 490,595 540,595 590,595 630,595 340,690 380,690 345,760 395,760 445,760 495,760 545,760 340,820 390,820 440,820 490,820 540,820 420,890 490,890 420,960 490,960 4860,1130 5210,1130 5260,1130 4920,1130.83 1364,1860 3290,1880
  other v2: 1322.5,814.07 1260,816.5 1250,995 1335,995 1020,1070 1080,1070 1145,1070 1220,1070 1310,1070 485,1630 615,1630 833.57,1632.58 975.41,1637.6 194.69,1727.97 835,1850 930,1850 315,1855 199.71,1857.26 410.57,1938.85 554.93,1938.84 268.76,1940.09 710.57,1943.86
  other v3: 1105,1635 855,1710 925,1710 850,1790 925,1790
  other v5: 3531.11,570.1 2010.01,796.78 2040.37,828.33 60.24,2063.82 60.24,2176.54 60.24,2292.62 60.24,2423.95 60.24,2541.13 60.24,2637.11 155,2726.44 60.24,2743.14 155,2820.18 60.24,2836.88 305,2866.32 155,2905 60.24,2932.86 310,2945 155,2998.75 310,3005
HALL_U: P2.8
HALL_V: P2.7
HALL_W: P2.6
HO1: D10.2 P1.23 R30.1 | length 2581.2
  Top Layer w20: R30.1@3340,2287 3342.59,2287 3355.59,2274 3355.59,2272.49 3384.43,2243.65 3384.43,2200 3384.43,2114.43 3208.9,1938.9 3208.9,1791.1 3246.6,1753.4 v2(3920.45,1753.4)
  Bottom Layer w10: P1.23@3782.39,675.19 3820.19,675.19 4050.77,905.77 4050.77,1623.07 v2(3920.45,1753.4)
HO2: D8.2 P1.7 R28.1 | length 2423.7
  Top Layer w10: 2200,1707.49 2286.93,1620.57 2853.16,1620.57 3598.53,875.19 P1.7@3682.39,875.19
  Top Layer w20: D8.2@2170,2200 D8.2@2180,2190 ; D8.2@2180,2175 D8.2@2180,2190 ; D8.2@2180,2193 2180,2196.86 2180,2213 R28.1@2180,2260.74 ; D8.2@2180,2198.86 D8.2@2180,2190 ; 2200,1707.49 2200,2170 D8.2@2180,2190
HO3: D3.2 P1.20 R26.1 | length 3449.5
  Top Layer w20: R26.1@1150.65,2322.57 1172.55,2300.68 D3.2@1172.55,2243.13 1225.91,2189.76 1225.91,1804.09 1342.21,1687.79 v2(1563.72,1687.79)
  Bottom Layer w10: v2(1563.72,1687.79) 1576.97,1674.54 1928.26,1674.54 2577.14,1025.66 3731.92,1025.66 P1.20@3782.39,975.19
HU: P2.21 P8.4 R53.1 | length 5598.7
  Top Layer w10: P2.21@1783.01,874.69 1862.14,953.81 2073.83,953.81 2073.83,930.07 2061.97,918.21 1991.06,918.21 1959.79,886.95 1959.79,754.61 1979.4,735 3463.46,735 v2@3542.41,656.04 ; v3(3907.31,592.79) 4027.29,712.78 4027.29,1207.29 4545,1725 4545,1940 5075,2470 5075,2851.55 5119.82,2896.37 P8.4@5209.99,2896.37
  Bottom Layer w10: v2(3542.22,655.85) 3542.22,614.08 3626.3,530 3844.51,530 v3(3907.31,592.79)
HV: P2.20 P8.3 R52.1 | length 5777.6
  Top Layer w10: R52.1@2073.62,1062.49 1870.81,1062.49 1731.52,923.2 1731.52,752.2 1755.97,727.75 1860.66,727.75 1898.4,690 3336.91,690 v2@3609.62,417.3 ; v1(3879.41,469.41) 4074.07,664.07 4074.07,1174.07 4580,1680 4580,1895 5125,2440 5125,2745 5176.37,2796.37 P8.3@5209.99,2796.37
  Bottom Layer w10: v2(3608.65,417.59) 3611.72,420.66 3830.66,420.66 v1(3879.41,469.41)
HW: P2.19 P8.2 R51.1 | length 5098.1
  Top Layer w10: P2.19@1783.01,1074.69 1858.96,1150.64 2073.36,1150.64 2073.36,1182.44 2096.11,1205.19 2359.16,1205.19 2719.05,845.3 3423.31,845.3 v5(3549.68,718.93) ; v3(3980,768.01) 3980,1235 4510,1765 4510,1990 5008.5,2488.5 v2@5008.5,2651.28
  Bottom Layer w10: v5(3549.68,718.93) 3642.86,625.75 3837.75,625.75 v3(3980,768.01) ; v2(5008.51,2651.27) 5053.61,2696.37 P8.2@5209.99,2696.37
LED1: LED1.1 P2.14 | length 2684
  Top Layer w10: P2.14@1682.39,175.19 1772.58,85 3995.92,85 4184.15,273.23 LED1.1@4251.05,273.23
LED2: LED2.1 P1.14 | length 712.7
  Top Layer w10: P1.14@3682.39,175.19 3732.58,125 3895,125 4188,418 LED2.1@4252.9,418
LED3: P2.11 R11.2 | length 3171.3
  Top Layer w10: P2.11@1682.39,475.19 1607.5,475.19 1572.13,439.81 1572.13,132.54 1642.28,62.39 4080.86,62.39 4162.58,144.11 R11.2@4248.35,144.11
LO1: D11.2 P1.26 R31.1 | length 2209
  Top Layer w10: P1.26@3782.39,375.19 P1.26@3782.62,375.19 3838.38,375.19 4040,576.81 v2(4040,585) ; D11.2@3800.27,2219.87 D11.2@3811.77,2208.37
  Top Layer w20: D11.2@3800.27,2219.87 3840.14,2259.74 R31.1@3840.14,2292 ; v2(3811.78,2155.6) D11.2@3811.77,2208.37
  Bottom Layer w10: v2(3811.78,2155.6) 4084.53,1882.85 4084.53,629.53 v2(4040,585)
LO2: D9.2 P1.10 R29.1 | length 2742
  Top Layer w10: v2(3175.48,1202.33) 3620,757.82 3620,582.98 3627.79,575.19 P1.10@3682.39,575.19
  Top Layer w20: v2@2682.14,2151.81 2682.14,2213.79 2682.14,2257.71 R29.1@2717.01,2292.58
  Bottom Layer w20: v2(2682,2149.2) 3311.88,2149.2 3413.77,2047.31 3413.77,1440.64 v2(3175.48,1202.33)
LO3: D7.2 P1.24 R27.1 | length 3255.7
  Top Layer w10: v1(2080,2030.77) 2120,1990.77 2120,1616.81 2340,1396.81 2915.74,1396.81 3596.42,716.13 3596.42,554.77 3621.19,530 3737.2,530 P1.24@3778.36,571.17
  Top Layer w20: D7.2@1651.43,2195 R27.1@1651.43,2285.4 ; D7.2@1660.08,2190 1667.3,2182.78 1667.3,2147.7 1685,2130 v1(1750,2130)
  Bottom Layer w20: v1(1750,2130) 1859.23,2020.77 2070,2020.77 v1(2080,2030.77)
NetC4_1: C4.1 U4.4 | length 82
  Top Layer w20: U4.4@1020.79,1273.03 C4.1@1020.79,1355
NetC4_2: C4.2 PL1.2 R37.1 U4.8 | length 723
  Top Layer w20: R37.1@625.39,1054.61 671.78,1008.22 PL1.2@814.94,1008.22 ; 745,1070 765,1070 804.94,1109.94 ; 825.06,1109.94 850,1085 850,1070
  Top Layer w23: U4.8@826.88,1121.88 851.88,1121.88 910,1180 910,1327.68 902.28,1335.39 C4.2@902.28,1355.39
  Top Layer w50: PL1.2@814.94,1008.22 814.94,1109.94
NetC7_1: C7.1 R20.1 R26.2 R36.2 UH.1 | length 318.3
  Top Layer w20: UH.1@1009.15,2577.35 1009.15,2543.45 1024.66,2527.95 1059.05,2527.95 R36.2@1068,2519 ; C7.1@1068,2465 R36.2@1068,2518.51 ; C7.1@1069.58,2468.6 1069.58,2411 1066.95,2408.36 1058.41,2408.36 1069.58,2408.36 R26.2@1150.5,2408.36
NetC11_1: C11.1 R21.1 R27.2 R38.2 UL.1 | length 281
  Top Layer w20: R27.2@1664.61,2357.35 R21.1@1728.68,2357.35
  Top Layer w30: R21.1@1733.68,2357.35 1733.68,2420 1733.68,2435 1733.68,2485 UL.1@1733.68,2574.29
NetC16_1: C16.1 R22.1 R28.2 R39.2 VH.1 | length 331.6
  Top Layer w20: VH.1@2099.96,2555.04 2099.96,2544.05 2114.26,2529.75 2125.25,2529.75 2159,2496 2159,2481 2165,2475 R39.2@2168,2475 ; R39.2@2158.74,2468.74 2172.5,2454.98 2172.5,2423.7 2173,2423.2 C16.1@2173,2415 ; C16.1@2176.49,2415 2176.49,2350 R22.1@2267.05,2350
NetC20_1: C20.1 R23.1 R29.2 R40.2 VL.1 | length 314
  Top Layer w20: R29.2@2720,2363 2724.5,2367.5 2795.5,2367.5 R23.1@2800,2363 2802.59,2363 2815.59,2376 2815.59,2378.59 2820.72,2383.72 2820.72,2430 2820.72,2490 VL.1@2820.72,2583.13
NetC24_1: C24.1 R24.1 R30.2 R41.2 WH.1 | length 315.5
  Top Layer w20: WH.1@3201.44,2568.27 3251.14,2518.57 3251.14,2485 3251.14,2425 R24.1@3251.14,2358.63 ; R24.1@3250.3,2357.64 R24.1@3261.28,2357.64 ; R24.1@3261.28,2354.24 R24.1@3261.28,2357.64 ; R30.2@3332.17,2357.64 R24.1@3261.28,2357.64
NetC34_1: C34.1 R25.1 R31.2 R44.2 WL.1 | length 293.2
  Top Layer w20: R31.2@3836.16,2364.61 R25.1@3918.11,2364.61 ; WL.1@3918.63,2578.67 3920,2577.3 3920,2490 3920,2435 R25.1@3920,2368
NetCE3_1: CE3.1 D13.2 U4.5 | length 474.2
  Top Layer w20: D13.2@110,1001.5 D13.2@139,1001.5
  Top Layer w23: 666.97,1273.03 U4.5@813.79,1273.03
  Top Layer w50: D13.2@139,1001.5 CE3.1@350,1212.5
NetD1_2: D1.2 R79.2 | length 108.1
  Top Layer w20: D1.2@1345.04,1945 1345.04,1995.04 1356.76,2006.76 1359.35,2006.76 1385,2032.41 R79.2@1385,2035
NetD2_2: D2.2 R78.2 | length 93.3
  Top Layer w25: R78.2@2442,2025 2445.98,2021.02 2445.98,1938.98 D2.2@2449.96,1935
NetD3_1: D3.1 R20.2 | length 87.8
  Top Layer w20: D3.1@1038.69,2243.13 1038.69,2303.01 R20.2@1058.41,2322.73
NetD4_2: D4.2 R77.2 | length 91.2
  Top Layer w20: R77.2@3557,2060 3558.48,2058.52 3558.48,1971.48 D4.2@3559.96,1970
NetD7_1: D7.1 R21.2 | length 115.5
  Top Layer w20: R21.2@1745,2277 1745,2229.49 1784.49,2190 D7.1@1790,2190 D7.1@1785.29,2194.71
NetD8_1: D8.1 R22.2 | length 114.5
  Top Layer w20: R22.2@2260,2275 2294.96,2240.04 D8.1@2294.96,2190 ; D8.1@2310,2175 D8.1@2310,2190
NetD9_1: D9.1 R23.2 | length 97.5
  Top Layer w20: R23.2@2800,2297 2802.59,2297 2815.59,2284 2815.59,2281.41 2832.22,2264.78 2832.22,2216.64 D9.1@2833.86,2215
NetD10_1: D10.1 R24.2 | length 97.4
  Top Layer w20: D10.1@3250.01,2186.63 3250.01,2283.87 R24.2@3250.14,2284
NetD11_1: D11.1 R25.2 | length 65.3
  Top Layer w20: D11.1@3929.29,2224.71 R25.2@3929.29,2290
NetLED1_2: LED1.2 R10.1 | length 80.9
  Top Layer w10: R10.1@4325,195 LED1.2@4325,275.87
NetLED2_2: LED2.2 R14.1 | length 80.3
  Top Layer w10: R14.1@4325,350 LED2.2@4325,430.31
NetLED3_2: LED3.2 R11.1 | length 83
  Top Layer w20: R11.1@4311.85,145 4338.53,118.32 LED3.2@4338.53,73
NetLED_POWER_1: LED_POWER.1 R65.2 | length 89.2
  Top Layer w20: LED_POWER.1@950,77 953,80 R65.2@1038,80
NetP4_2: P4.2 R12.1 | length 1495.8
  Top Layer w10: R12.1@4310.18,1249.53 4310.18,1345.18 4615,1650 4615,1885 4947.85,2217.85 P4.2@5211.21,2217.85
NetP4_3: P4.3 R9.2 | length 1949.3
  Top Layer w10: R9.2@4311.85,1175 4350.31,1175 4415.41,1240.1 4415.41,1385.41 4650,1620 4650,1870 4735.86,1955.86 5254.08,1955.86 ; P4.3@5210.27,2317.85 5257.82,2317.85 5307.5,2268.17 5307.5,2008.74 5254.61,1955.86
NetR1_1: R1.1 R55.2 | length 126.5
  Top Layer w15: R55.2@1842,1850 R1.1@1918,1926
  Top Layer w20: R1.1@1918,1926 R1.1@1918,1945
NetR2_1: R2.1 R59.2 | length 129.4
  Top Layer w20: R59.2@2907.14,1862.01 2907.14,1871.14 2983,1947 R2.1@2983,1960
NetR3_1: R3.1 R61.2 | length 90
  Top Layer w20: R61.2@4068.14,1882.01 R3.1@4068.14,1972.01
NetR18_2: R18.2 U3.3 | length 222
  Top Layer w20: R18.2@1165,700 1319.62,700 1350.57,669.06 U3.3@1374.21,669.06
NetR37_2: R37.2 U4.7 | length 335.2
  Top Layer w10: 655,1220 675,1220 ; 710,1185 675,1220 ; 720,1185 685,1220 ; 725,1173.03 725,1190 695,1220 685,1220 ; 675,1220 685,1220
  Top Layer w23: 676.97,1173.03 725,1173.03 U4.7@813.79,1173.03
NetR74_2: R74.2 R75.1 | length 66.2
  Top Layer w10: R74.2@393.64,1402.14 R75.1@459.79,1402.14
NRST: P2.23
OC: P2.4
P0.0: P2.22
P0.4: P2.25
P1.10: P1.5
P1.11: P1.18
P2.2: P2.18
P2.3: P2.5
P2.10: P2.17